# Altium PCB programmer.PcbDoc
Units mm, origin at the board's own origin, x right, y up, seen from the top; angles counter-clockwise.
Board outline 24 x 20.5 mm, 2 copper layers (Top Layer, Bottom Layer); 7 components, 10 nets, 57 pads, 8 vias.
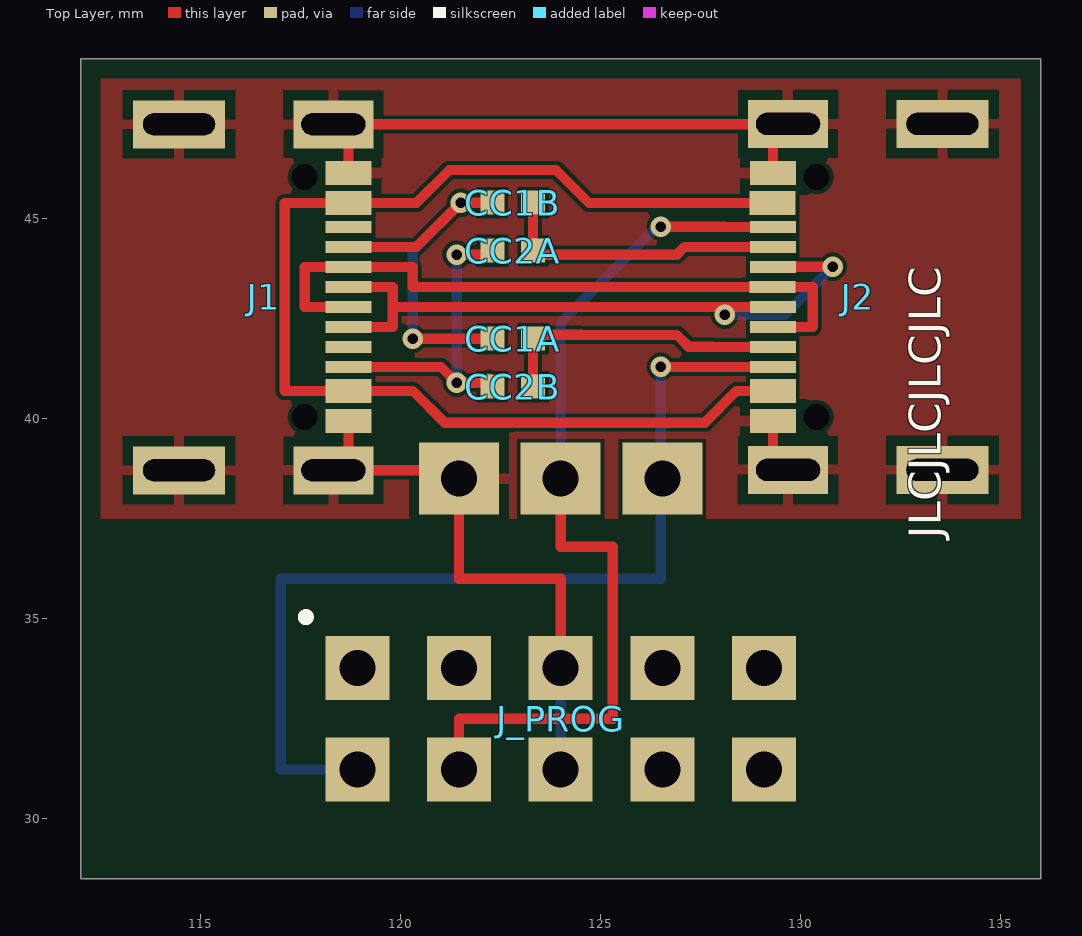
[diagram p0: Top Layer view]
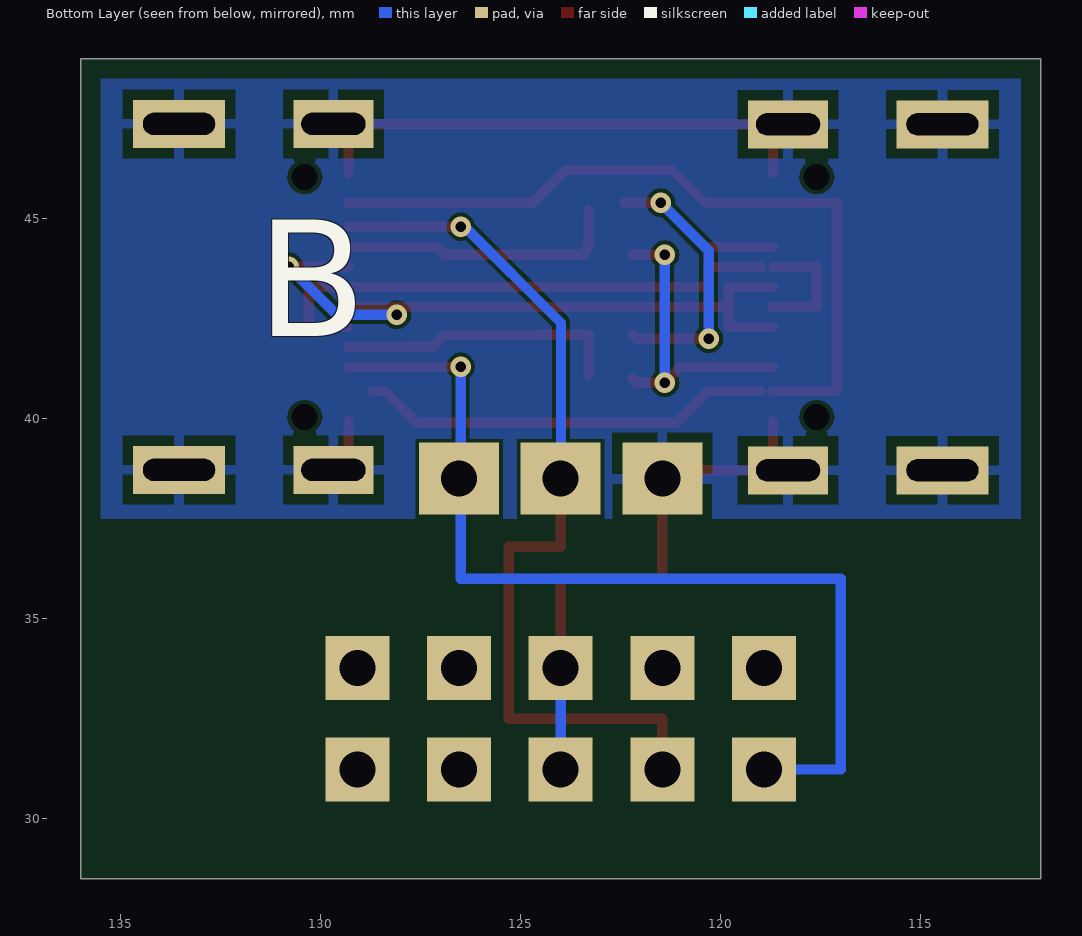
[diagram p1: Bottom Layer view, seen from below]

## Layer stack, top to bottom
Top Solder: solder mask 0.0102, Solder Resist, Dk 3.5
Top Layer: signal copper 0.0356
Dielectric 1: dielectric 0.32, FR-4, Dk 4.8
Bottom Layer: signal copper 0.0356
Bottom Solder: solder mask 0.0102, Solder Resist, Dk 3.5

## Board outline
112,28.5 136,28.5 136,49 112,49

## Design rules (kind name [scope] priority, off if disabled: settings)
Clearance [All] p1: gap=0.1 ignorepadtopadclearanceinfootprint=FALSE
PolygonConnect [All] p1: connectstyle=Relief reliefconductorwidth=0.254 reliefentries=4 polygonreliefangle="90 Angle" airgapwidth=0.254
RoutingVias [All] p1: holewidth=0.711 width=1.27 viastyle="Through Hole" minholewidth=0.711 minwidth=1.27 maxholewidth=0.711 maxwidth=1.27
SolderMaskExpansion [All] p1: expansion=0.102
Width [All] p1: maxlimit=0.254 minlimit=0.254 preferedwidth=0.254
30 further rules are at their usual default settings.

## Components (designator, comment, footprint, x,y, rotation, side; value= is the part's Value field where it differs from the comment)
CC1A "0402WGF0000TCE" R_0402 122.8,42 r0 top value=0R
CC1B "0402WGF0000TCE" R_0402 122.8,45.4 r0 top value=0R
CC2A "0402WGF0000TCE" R_0402 122.8,44.2 r0 top value=0R
CC2B "0402WGF0000TCE" R_0402 122.8,40.8 r0 top value=0R
J1 "918-418K2023S40001" DX07S016JA1R1500 115.4,43.041 r270 top
J2 "918-418K2023S40001" DX07S016JA1R1500 132.6,43.041 r90 top
J_PROG "DS1023-2*5SF11" HDR_FEM_2X5P 124,32.5 r0 top

## Footprints (in the part's own frame and the unit in brackets; to place one, negate y for a bottom-side part, rotate by r counter-clockwise, add the part's x,y. Pads: shape width x height; smd on the part's side, far side on the other; paste and mask are expansions set on the pad)
DX07S016JA1R1500 [mm] "USB-C (USB TYPE-C) USB 2.0 Receptacle Connector 24 (16+8 Dummy) Position Surface Mount, Right Angle"
  rect 1.2x2 hole 0.55 slot 1.6 at 90 deg: 0(-4.32,2.917) 0(4.33,2.917)
  rect 1.2x2.3 hole 0.55 slot 1.8 at 90 deg: 0(-4.32,-0.943) 0(4.33,-0.943)
  rect 0.6x1.15 smd: A1_B12(-3.1,3.297) A4_B9(-2.35,3.297) A9_B4(2.35,3.3) A12_B1(3.1,3.297)
  rect 0.3x1.15 smd: A5(-1.25,3.297) A6(-0.25,3.297) A7(0.25,3.3) A8(1.25,3.297) B5(1.75,3.297) B6(0.75,3.297) B7(-0.75,3.297) B8(-1.75,3.297)
  round 0 hole 0.65 unplated: M(-3,2.2) M(3,2.2)
  body extent -4.47,-3.35 4.47,3.55, height 3.18
HDR_FEM_2X5P [mm] "10 Pin 2 Row Header"
  rect 1.6x1.6 hole 0.9: 1(-5.08,1.27) 2(-5.08,-1.27) 3(-2.54,1.27) 4(-2.54,-1.27) 5(0,1.27) 6(0,-1.27) 7(2.54,1.27) 8(2.54,-1.27) 9(5.08,1.27) 10(5.08,-1.27)
  silkscreen extent -6.47,2.44 -6.27,2.64
R_0402 [mm] "Body 1.0 x 0.5 mm (LxW typ)"
  rect 0.6x0.6 smd: 1(-0.508,0) 2(0.508,0)
  body extent -0.5,-0.25 0.5,0.25, height 0.35

## Part data
CC1A CC1B CC2A CC2B: "R - RESISTOR - SMD - 0R - 1% - 0402", JLC Availability=Basic, LCSC Part #=C17168
J1 J2: "J - JACK - USB - Type C - Recepticle - SMT - 90°", JLC Availability=LCSC, LCSC Part #=C167321
J_PROG: "J - JACK - PIN_HEADER 2X5P", JLC Availability=Extended, LCSC Part #=C125068

## Free pads (board coordinates)
  rect 2x1.8 hole 0.9: 2(126.54,38.5) 3(124,38.5) 4(121.46,38.5)

## Via types
v1: diameter 0.508, hole 0.254, Top Layer to Bottom Layer, tented both sides, 8 vias

## Nets (pads, with @x,y where several pads share a name; then routed paths per layer and width w, separated by ;. In a path a pad name is that pad's centre, name@x,y a point inside that pad or via, vN(x,y) a via of type N, cw(c..) or ccw(c..) an arc to the next point about the centre after c; other vN are vias at no path point)
CC1_IN: CC1A.1 CC1B.1 J1.A5 | length 10
  Top Layer w0.254: J1.A5 120.391,44.291 v1(121.5,45.4) CC1B.1 CC1B.1@122.4,45.4 ; v1(120.3,42) 122.1,42 CC1A.1@122.2,42.1
  Bottom Layer w0.254: v1(120.3,42) 120.3,44.2 v1(121.5,45.4)
CC1_OUT: CC1A.2 CC2B.2 J2.A5 | length 8.3
  Top Layer w0.254: CC1A.2@123.292,42.092 CC1A.2@123.308,42.092 ; 123.308,41.1 CC1A.2@123.308,42.092 ; 127.8,41.8 127.2,41.8 126.908,42.092 124.492,42.092 ; 127.809,41.791 J2.A5 ; CC1A.2@123.308,42.092 124.492,42.092 ; CC1A.2@123.308,42.092 123.308,42.1 124.5,42.1 124.492,42.092
CC2_IN: CC2A.1 CC2B.1 J1.B5 | length 7.8
  Top Layer w0.254: J1.B5 121.009,41.291 v1(121.4,40.9) 122.1,40.9 CC2B.1@122.2,41 ; v1(121.4,44.1) CC2A.1@122.2,44.1
  Bottom Layer w0.254: v1(121.4,40.9) v1(121.4,44.1) v1@121.4,44.2
CC2_OUT: CC1B.2 CC2A.2 J2.A8 | length 7
  Top Layer w0.254: CC2A.2@123.3,44.3 CC2A.2@123.308,44.292 ; CC1B.2@123.308,45.2 CC2A.2@123.308,44.292 ; CC2A.2@123.4,44.1 126.9,44.1 127.091,44.291 J2.A8 ; CC2A.2@123.4,44.2 CC2A.2@123.308,44.292
CLK: J2.B8 J_PROG.2 pad.2 | length 23.9
  Top Layer w0.254: v1@126.5,41.291 J2.B8
  Bottom Layer w0.254: J_PROG.2 117,31.23 117,36 126.5,36 pad.2@126.5,38 ; v1(126.5,41.3) 126.5,38.5 pad.2@126.6,38.4
DIO: J2.B5 J_PROG.4 pad.3 | length 22.3
  Top Layer w0.254: J_PROG.4 121.46,32.5 125.3,32.5 125.3,36.8 124,36.8 pad.3@124,38 ; v1(126.5,44.8) 126.5,44.7 126.6,44.8 128.082,44.8 128.091,44.791 J2.B5
  Bottom Layer w0.254: pad.3 123.992,38.508 123.992,42.392 126.4,44.8 v1(126.5,44.8)
GND: J1.0 J1.A1_B12 J1.A12_B1 J2.0 J2.A1_B12 J2.A12_B1 J_PROG.5 J_PROG.6 pad.4 | length 29.7
  Top Layer w0.254: J1.A12_B1 118.697,39.091 118.317,38.711 120.889,38.711 pad.4@121.2,38.4 ; J1.A1_B12 118.697,46.981 118.317,47.361 129.639,47.361 J2.0@129.656,47.344 ; pad.4 121.46,36 124,36 J_PROG.5 ; J2.A1_B12 129.303,39.101 J2.0@129.683,38.721 ; J2.A12_B1 129.303,46.991 J2.0@129.656,47.344 ; J2.0@129.7,47.3 J2.0@129.656,47.344
  Bottom Layer w0.254: J_PROG.6 J_PROG.5
USB_DM: J1.A7 J1.B7 J2.A7 J2.B7 | length 17
  Top Layer w0.254: J1.B7 117.6,43.791 117.6,42.791 J1.A7 ; J1.B7@118.997,43.791 120.3,43.791 120.3,43.291 129.291,43.291 J2.A7@129.3,43.3 ; J2.A7 130.3,43.291 130.3,42.291 J2.B7
USB_DP: J1.A6 J1.B6 J2.A6 J2.B6 | length 17.4
  Top Layer w0.254: J1.B6 119.8,42.291 119.8,42.791 ; J1.A6 119.8,43.291 119.8,42.791 ; J2.B6@129.294,43.8 J2.B6 129.312,43.8 v1(130.8,43.8) ; J2.A6@129.309,42.791 J2.A6 119.8,42.791
  Bottom Layer w0.254: v1(128.1,42.6) 129.6,42.6 v1(130.8,43.8)
VCC_5V: J1.A4_B9 J1.A9_B4 J2.A4_B9 J2.A9_B4 | length 29.5
  Top Layer w0.254: J1.A9_B4 117.1,40.691 117.1,45.391 J1.A4_B9 120.391,45.391 121.219,46.219 123.881,46.219 124.709,45.391 J2.A9_B4 ; J1.A9_B4@119,40.691 120.309,40.691 121.1,39.9 127.6,39.9 128.391,40.691 128.703,40.691
pads on no net: J1.A8 J1.B8 J1.M J2.M J_PROG.1 J_PROG.3 J_PROG.7 J_PROG.8 J_PROG.9 J_PROG.10

## Polygon pours and split planes (outlines as drawn)
GND on Bottom Layer "Bottom Layer-GND" (solid, pour order 4): 112.5,37.5 112.5,48.5 135.5,48.5 135.5,37.5
GND on Bottom Layer "Bottom Layer-GND 1" (solid, pour order 2): 128.1,36.5
GND on Top Layer "Top Layer-GND" (solid, pour order 0): 112.5,37.5 112.5,48.5 135.5,48.5 135.5,37.5

## Silkscreen, mask and mechanical layers (free items; w line width, h text height)
Top Overlay:
  text "JLCJLCJLCJLC" at 133.5,37 h0.8 r90
Bottom Overlay:
  text "B" at 131.6,41.1 h5
Board Outline (M30):
  the board outline again, w0.2